# Altium PCB STM32 茶叶温湿度.PcbDoc
Units mil, origin at the board's own origin, x right, y up, seen from the top; angles counter-clockwise.
Board outline 2950 x 2715 mil, 2 copper layers (Top Layer, Bottom Layer); 18 components, 20 nets, 91 pads, 0 vias.
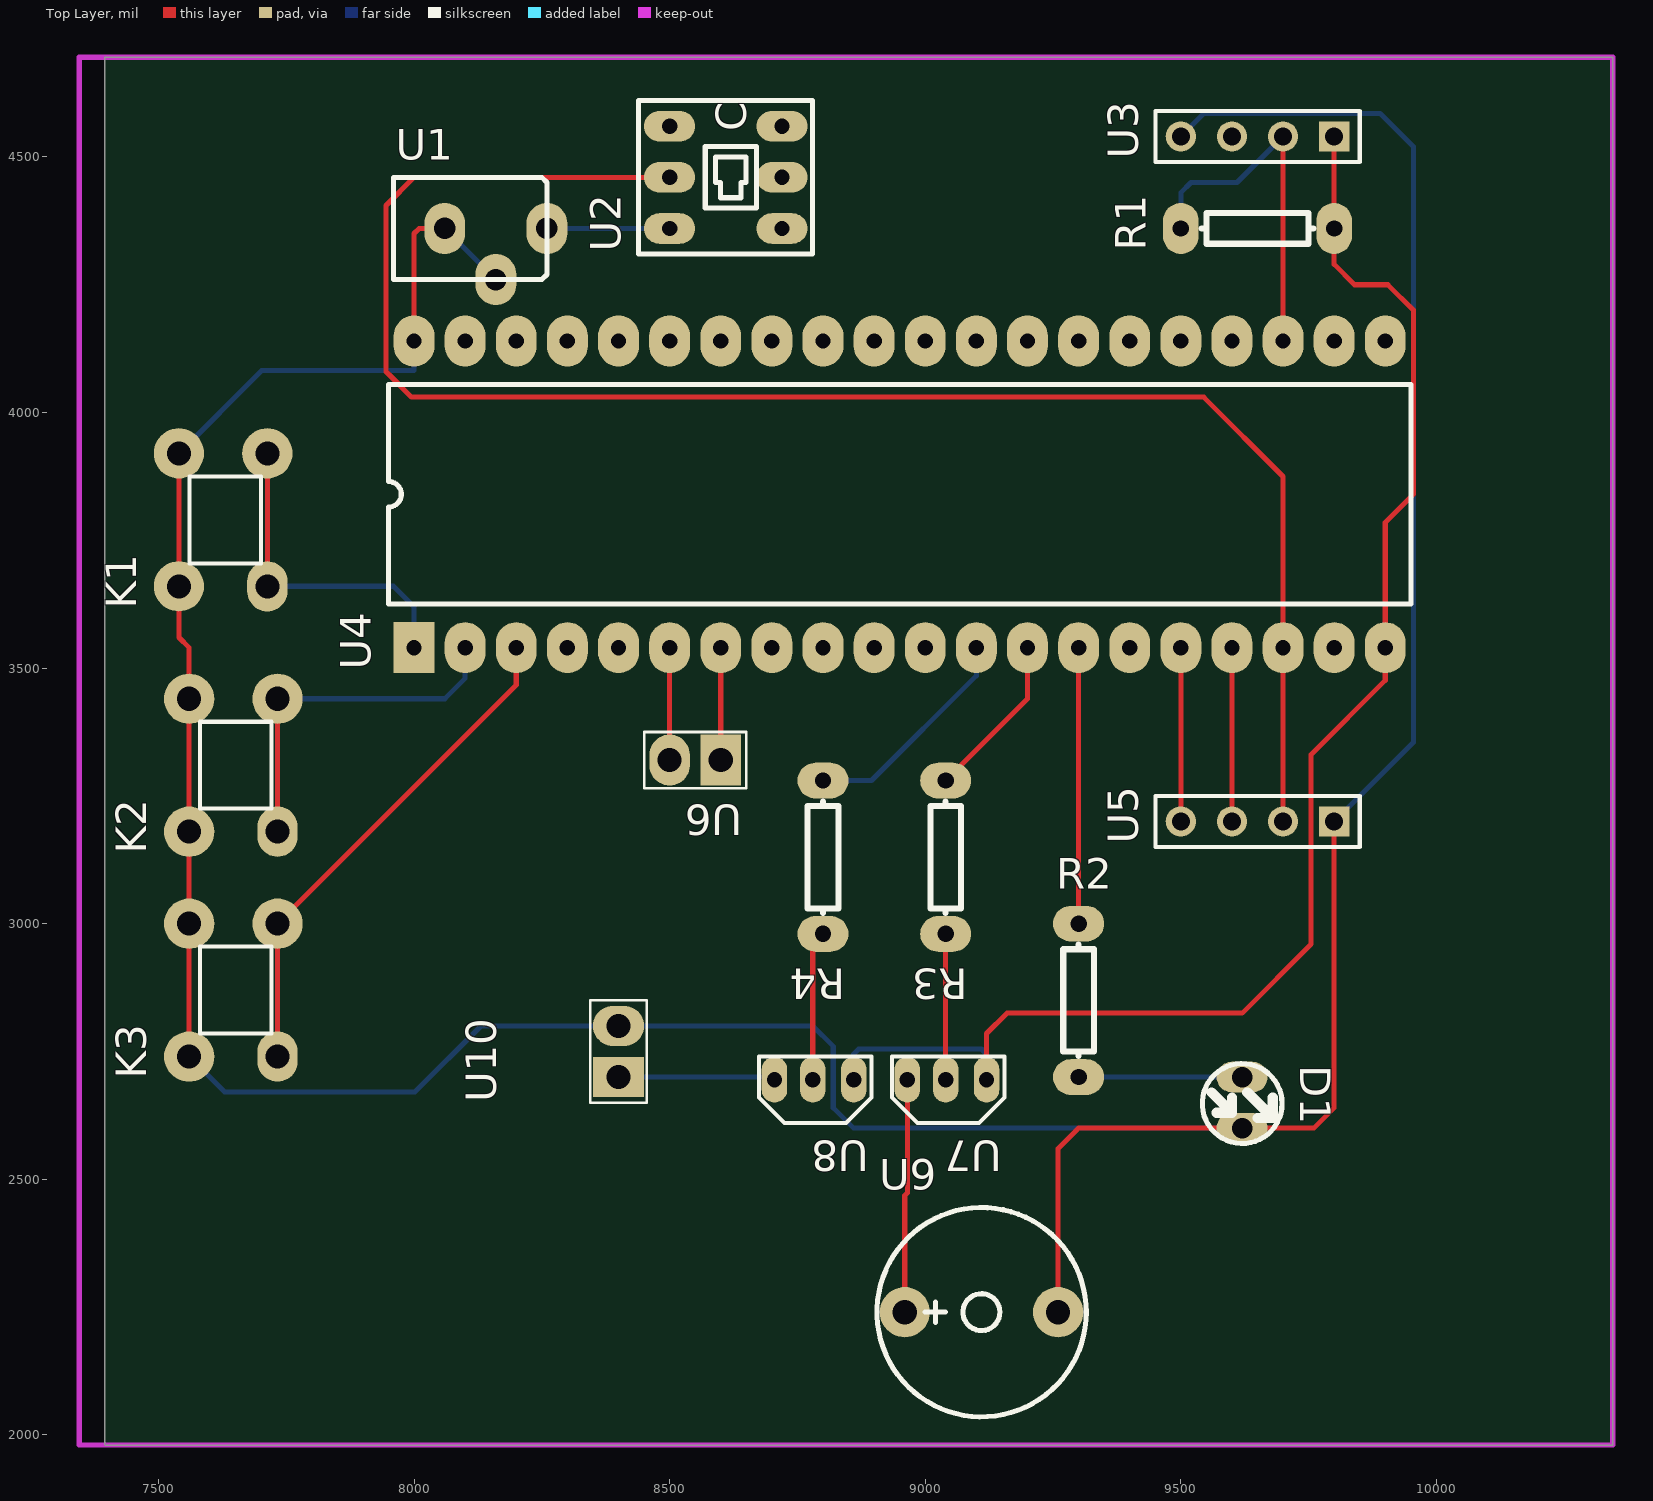
[diagram p0: Top Layer view]
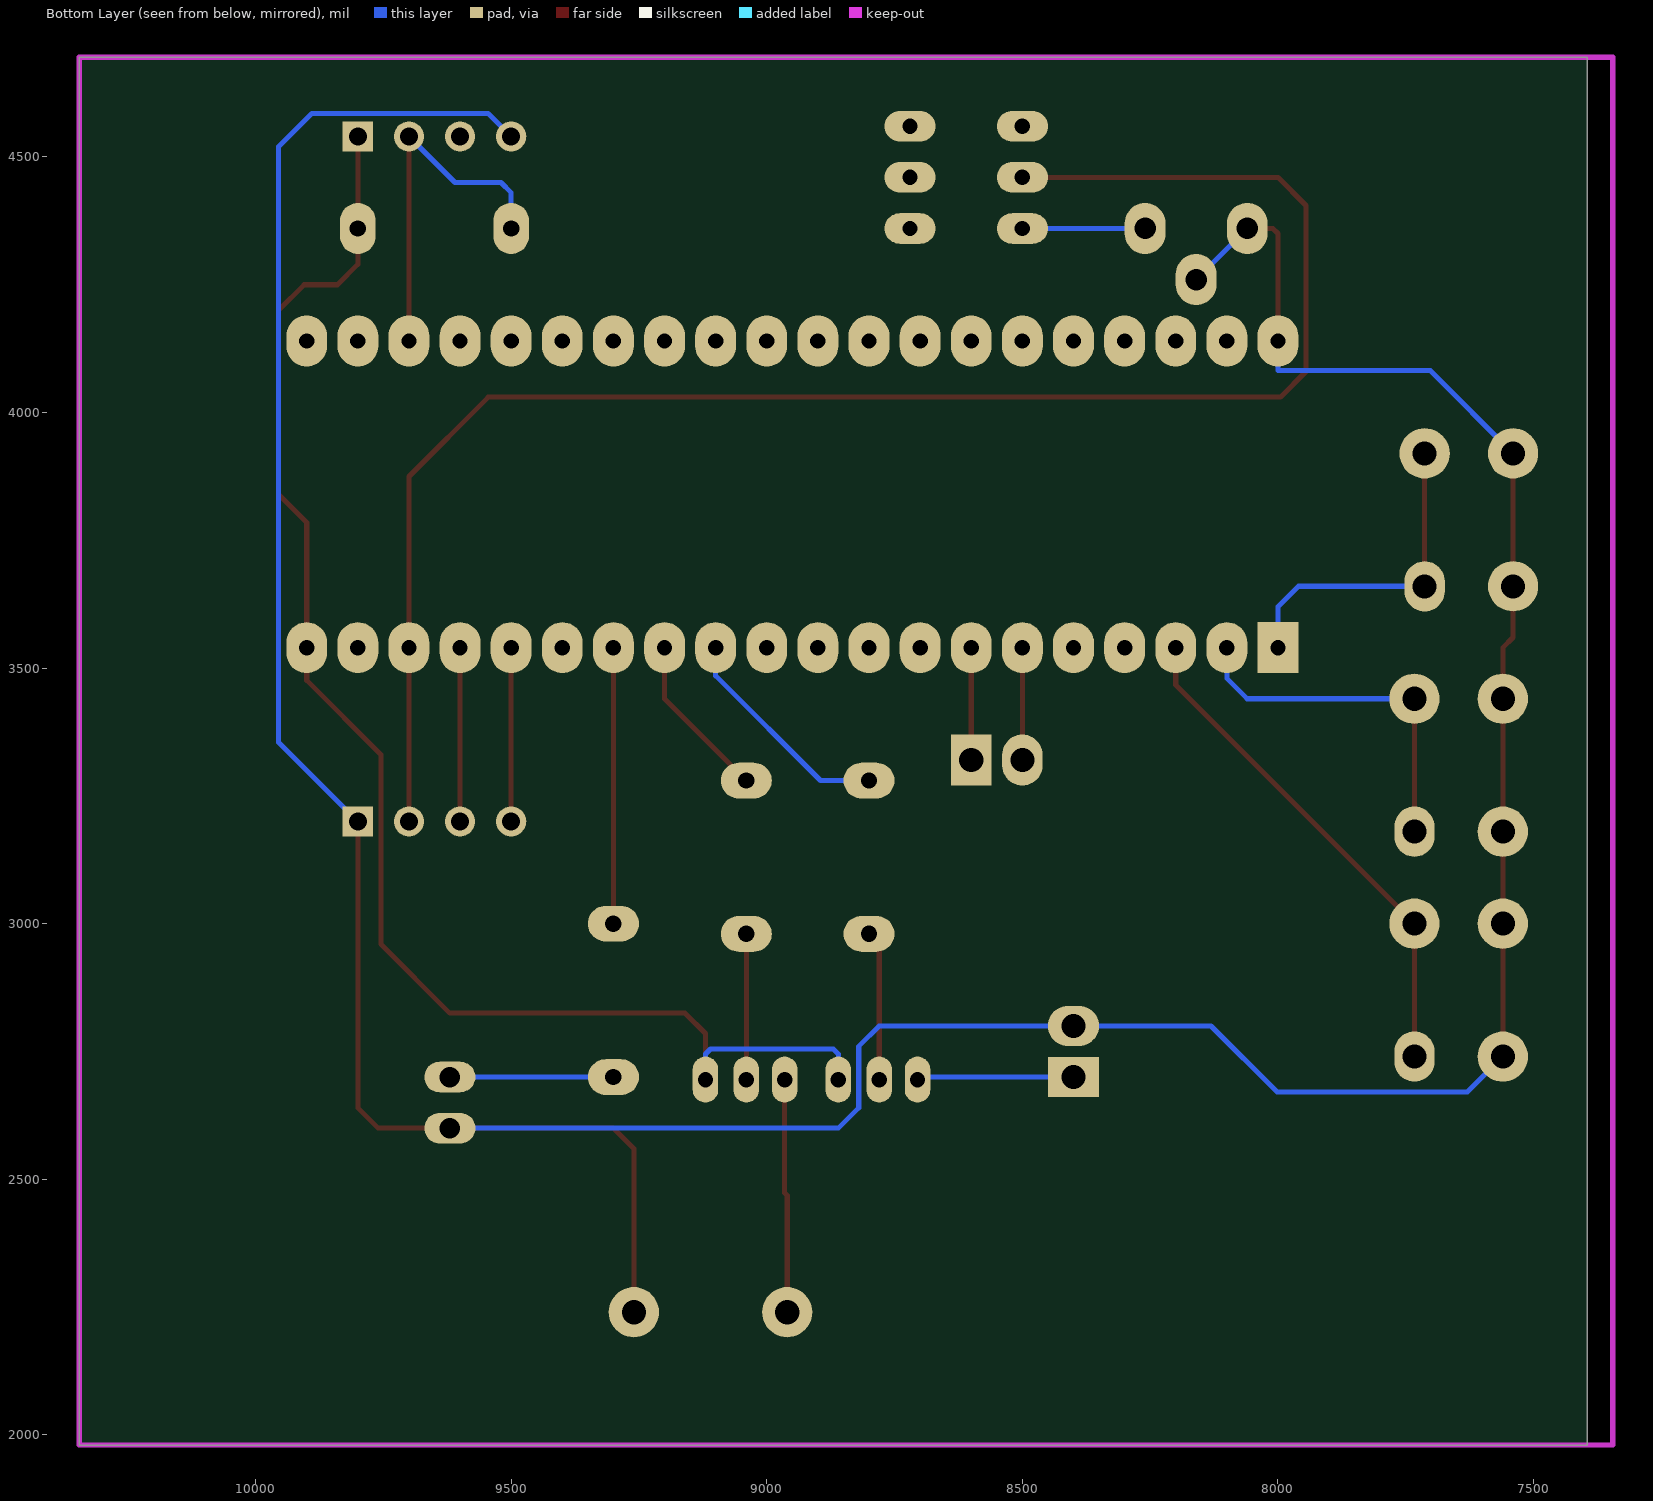
[diagram p1: Bottom Layer view, seen from below]

## Layer stack, top to bottom
Top Layer: signal copper 1.4
Dielectric: dielectric 12.6, FR-4, Dk 4.8
Bottom Layer: signal copper 1.4

## Board outline
7395,1980 10345,1980 10345,4695 7395,4695

## Design rules (kind name [scope] priority, off if disabled: settings)
Clearance [All] p1: gap=10
PolygonConnect [All] p1: connectstyle=Relief reliefconductorwidth=10 reliefentries=4 polygonreliefangle="90 Angle"
RoomDefinition "STM32 茶叶温湿度" [InComponentClass('STM32 茶叶温湿度')] p1: confinementstyle=ConfineIn formatcopy=TRUE lockcomponents=FALSE outline 0,0 2000,0 2000,1000 0,1000
RoutingVias [All] p1: holewidth=28 width=50 viastyle="Through Hole" minholewidth=28 minwidth=50 maxholewidth=28 maxwidth=50
SilkscreenOverComponentPads [All] p1: minsilkscreentomaskgap=10
SolderMaskExpansion [All] p1: expansion=4
Width [All] p1: maxlimit=10 minlimit=10 preferedwidth=10
27 further rules are at their usual default settings.

## Components (designator, comment, footprint, x,y, rotation, side; value= is the part's Value field where it differs from the comment)
D1 "LED2" LED 9620,2700 r270 top
K1 "KEY1" KEY1 7540,3920 r90 top
K2 "KEY1" KEY1 7560,3440 r90 top
K3 "KEY1" KEY1 7560,3000 r90 top
R1 "10K" R-DIP 9800,4360 r180 top
R2 "1K" R-DIP 9300,2700 r90 top
R3 "1K" R-DIP 9040,3280 r270 top
R4 "1K" R-DIP 8800,3280 r270 top
U1 "POW" DCM 8260,4360 r0 top
U2 "SWITCH" KG1 8500,4360 r90 top
U3 "dht11" HDR1X4 9800,4540 r180 top
U4 "STM32核心板" STC 8000,3540 r90 top
U5 "oled" HDR1X4 9800,3200 r180 top
U6 "CON2" SIP2 8600,3320 r180 top
U7 "s8550" PNP 9040,2700 r180 top
U8 "s8550" PNP 8780,2700 r180 top
U9 "3.3v 蜂鸣器" BEEP 8960,2240 r0 top
U10 "CON2" SIP2 8400,2700 r90 top

## Footprints (in the part's own frame and the unit in brackets; to place one, negate y for a bottom-side part, rotate by r counter-clockwise, add the part's x,y. Pads: shape width x height; smd on the part's side, far side on the other; paste and mask are expansions set on the pad)
BEEP [mm]
  round 2.5 hole 1.2: 1(0,0) 2(7.62,0)
  silkscreen extent -1.38,-5.2 9.02,5.2
DCM [mil]
  oval 80x100 hole 42: 1(0,0) 2(-200,0) 3(-100,-100)
  silkscreen extent -300,-100 0,100
HDR1X4 [mm] "Connector; Header; 4 Position"
  rect 1.5x1.5 hole 0.9: 1(0,0)
  round 1.5 hole 0.9: 2(2.54,0) 3(5.08,0) 4(7.62,0)
  silkscreen extent -1.27,-1.27 8.89,1.27
KEY1 [mil]
  round 98.43 hole 47: 1(-260,0) 1(0,0) 2(0,-173)
  oval 98.43x78.74 hole 47: 2(-260,-173)
  silkscreen extent -215,-161 -45,-21
KG1 [mil]
  oval 60x100 hole 30: 1(0,0) 2(0,-219.69) 3(100,0) 4(100,-219.69) 5(200,0) 6(200,-219.69)
  silkscreen extent -50,-280 250,61
LED [mil]
  oval 60x100 hole 40: 1(0,0) 2(100,0)
  silkscreen extent -26,-78 130,78
PNP [mil]
  oval 50x90 hole 30: 1(0,5) 2(-80,5) 3(75,5)
  silkscreen extent -115,-40 105,90
R-DIP [mil]
  oval 70x100 hole 32: 1(0,0) 2(300,0)
  silkscreen extent 41,-30 259,30
SIP2 [mm]
  rect 2x2.54 hole 1.2: 1(0,0)
  oval 2x2.54 hole 1.2: 2(2.54,0)
  silkscreen extent -1.27,-1.4 3.81,1.4
STC [mil]
  rect 100x80 hole 30: 1(0,0)
  oval 100x80 hole 30: 2(0,-100) 3(0,-200) 4(0,-300) 5(0,-400) 6(0,-500) 7(0,-600) 8(0,-700) 9(0,-800) 10(0,-900) 11(0,-1000) 12(0,-1100) 13(0,-1200) 14(0,-1300) 15(0,-1400) 16(0,-1500) 17(0,-1600) 18(0,-1700) 19(0,-1800) 20(0,-1900) 21(600,-1900) 22(600,-1800) 23(600,-1700) 24(600,-1600) 25(600,-1500) 26(600,-1400) 27(600,-1300) 28(600,-1200) 29(600,-1100) 30(600,-1000) 31(600,-900) 32(600,-800) 33(600,-700) 34(600,-600) 35(600,-500) 36(600,-400) 37(600,-300) 38(600,-200) 39(600,-100) 40(600,0)
  silkscreen extent 85,-1950 515,50

## Part data
D1: "Typical RED, GREEN, YELLOW, AMBER GaAs LED"
R2: library part Res2, "Resistor"
U3 U5: library part CON4
U7 U8: library part PNP
U9: library part BELL

## Nets (pads, with @x,y where several pads share a name; then routed paths per layer and width w, separated by ;. In a path a pad name is that pad's centre, name@x,y a point inside that pad or via, vN(x,y) a via of type N, cw(c..) or ccw(c..) an arc to the next point about the centre after c; other vN are vias at no path point)
+3V3: R1.1 U3.1 U4.20 U7.2 U8.2 | length 2930.9
  Top Layer w10: U7.2 9120,2785 9160,2825 9620,2825 9755,2960 9755,3331 9900,3476 U4.20 9900,3785 9955,3840 9955,4200 9905,4250 9840,4250 9800,4290 R1.1 U3.1
  Bottom Layer w10: U8.2 8860,2745 8870,2755 9110,2755 9120,2745 U7.2
ALARM: R3.1 U4.13 | length 326.3
  Top Layer w10: R3.1 9200,3440 U4.13
DATA1: R1.2 U3.2 U4.23 | length 715.6
  Top Layer w10: U4.23 U3.2
  Bottom Layer w10: R1.2 9500,4430 9520,4450 9610,4450 U3.2
DJ: R4.1 U4.12 | length 439.9
  Bottom Layer w10: R4.1 8895,3280 9100,3485 U4.12
GND: D1.2 K1.1 K2.1 K3.1 U1.2 U1.3 U3.4 U4.40 U5.1 U9.2 U10.2 | length 7822
  Top Layer w10: K1.1@7540,3920 7540,3660 7540,3560 7560,3540 7560,3440 7560,3180 7560,3000 K3.1@7560,2740 ; U4.40 8000,4350 8010,4360 U1.2 ; U9.2 9260,2560 9300,2600 D1.2 9760,2600 9800,2640 U5.1
  Bottom Layer w10: K1.1@7540,3920 7702,4082 8000,4082 U4.40 ; K3.1@7560,2740 7629,2671 8002,2671 8131,2800 U10.2 8780,2800 8820,2760 8820,2640 8860,2600 D1.2 ; U1.2 U1.3 ; U3.4 9545,4585 9890,4585 9955,4520 9955,3355 U5.1
K1: K1.2 U4.1 | length 643.6
  Top Layer w10: K1.2@7713,3660 K1.2@7713,3920
  Bottom Layer w10: K1.2@7713,3660 7960,3660 8000,3620 U4.1
K2: K2.2 U4.2 | length 703.6
  Top Layer w10: K2.2@7733,3180 K2.2@7733,3440
  Bottom Layer w10: K2.2@7733,3440 8060,3440 8100,3480 U4.2
K3: K3.2 U4.3 | length 993.4
  Top Layer w10: K3.2@7733,2740 7733,3000 8200,3467 U4.3
LED: R2.2 U4.14 | length 540
  Top Layer w10: R2.2 U4.14
NetD1_1: D1.1 R2.1 | length 320
  Bottom Layer w10: R2.1 D1.1
NetR3_2: R3.2 U7.1 | length 285
  Top Layer w10: U7.1 R3.2
NetR4_2: R4.2 U8.1 | length 305
  Top Layer w10: U8.1 8780,2980 R4.2
NetU1_1: U1.1 U2.1 | length 240
  Bottom Layer w10: U1.1 U2.1
NetU7_3: U7.3 U9.1 | length 457.1
  Top Layer w10: U9.1 8960,2468 8965,2473 U7.3
NetU8_3: U8.3 U10.1 | length 310
  Bottom Layer w10: U10.1 8705,2700 U8.3
SCK: U4.17 U5.3 | length 340
  Top Layer w10: U5.3 U4.17
SCL: U4.16 U5.4 | length 340
  Top Layer w10: U5.4 U4.16
URXD: U4.6 U6.2 | length 220
  Top Layer w10: U6.2 U4.6
UTXD: U4.7 U6.1 | length 220
  Top Layer w10: U6.1 U4.7
VCC: U2.3 U4.18 U5.2 | length 3417.7
  Top Layer w10: U2.3 8000,4460 7945,4405 7945,4080 7995,4030 9545,4030 9700,3875 U4.18 U5.2
pads on no net: U2.2 U2.4 U2.5 U2.6 U3.3 U4.4 U4.5 U4.8 U4.9 U4.10 U4.11 U4.15 U4.19 U4.21 U4.22 U4.24 U4.25 U4.26 U4.27 U4.28 U4.29 U4.30 U4.31 U4.32 U4.33 U4.34 U4.35 U4.36 U4.37 U4.38 U4.39

## Keep-outs
Keep-Out Layer:
  lines w10: 7345,1980 10345,1980 10345,4695 7345,4695 7345,1980

## Text inside footprints (layer, text, board x,y; h text height)
U2: Top Overlay "C" at 8649.68,4550 h60 r90